# Altium PCB 1601-1.PcbDoc
Units mm, origin at the board's own origin, x right, y up, seen from the top; angles counter-clockwise.
Board outline 52.59 x 19.12 mm, 2 copper layers (Top Layer, Bottom Layer); 13 components, 0 nets, 26 pads, 0 vias.
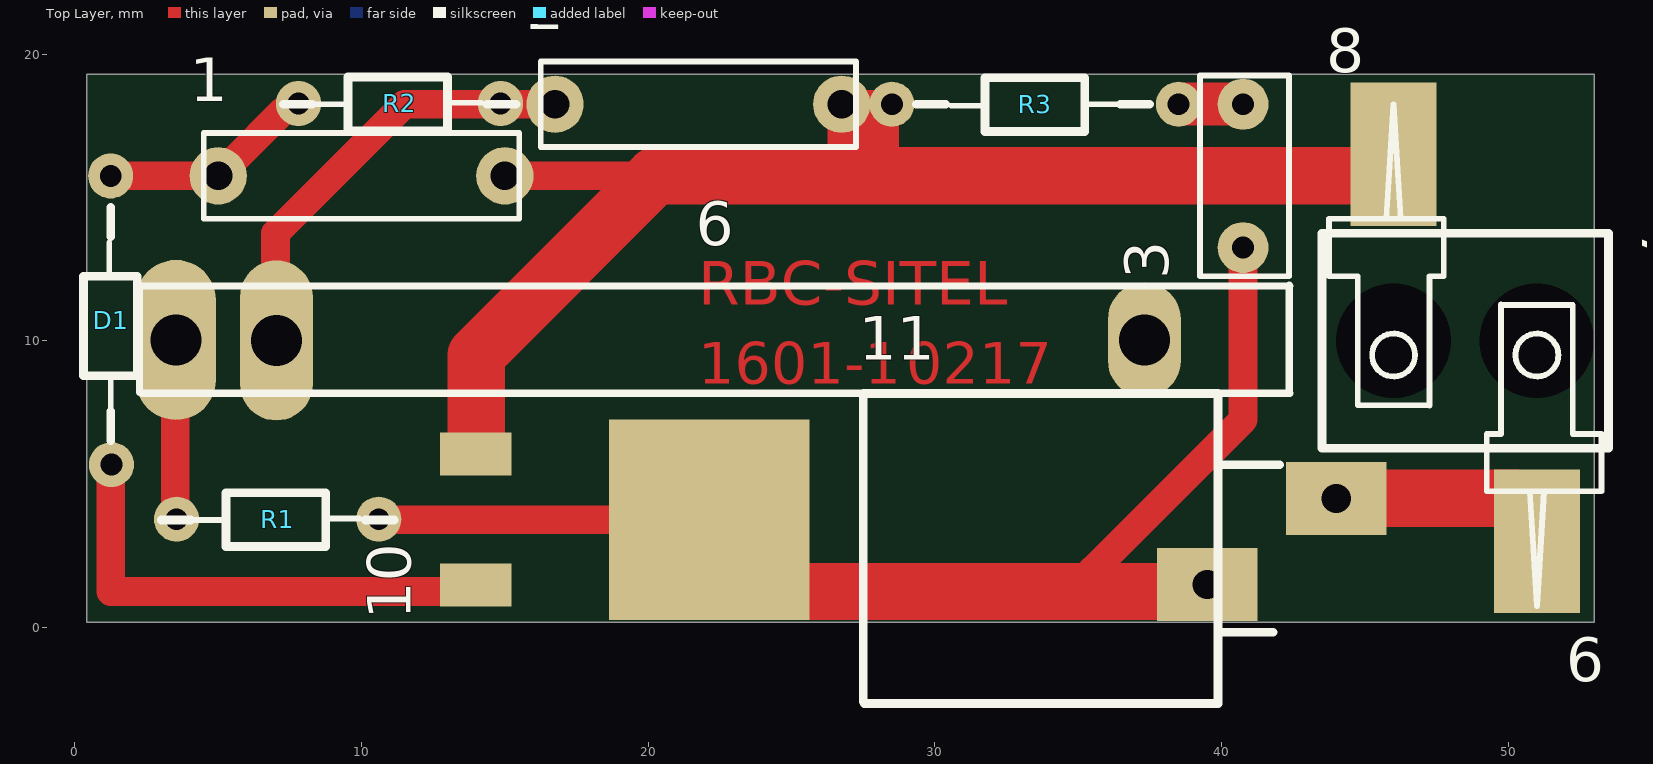
[diagram p0: Top Layer view]
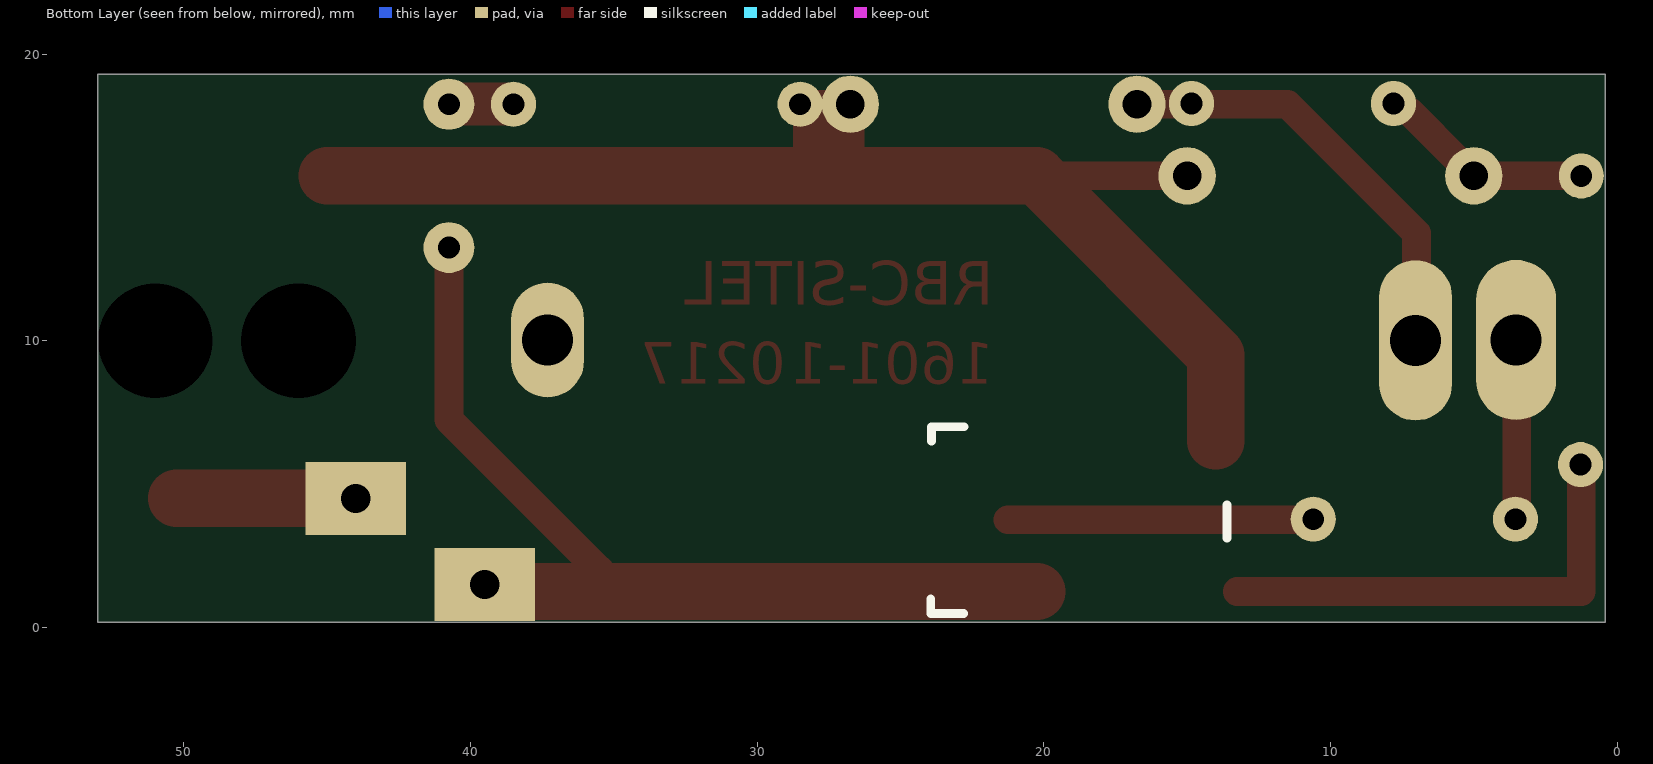
[diagram p1: Bottom Layer view, seen from below]

## Layer stack, top to bottom
Top Layer: signal copper 0.0356
Dielectric: dielectric 0.32, FR-4, Dk 4.8
Bottom Layer: signal copper 0.0356

## Board outline
0.412,0.179 53,0.179 53,19.301 0.412,19.301

## Design rules (kind name [scope] priority, off if disabled: settings)
Clearance [All] p1: gap=0.254
PlaneClearance [All] p1: clearance=0.254
PolygonConnect [All] p1: connectstyle=Relief reliefconductorwidth=0.254 reliefentries=4 polygonreliefangle="90 Angle"
RoutingVias [All] p1: holewidth=0.711 width=1.27 viastyle="Through Hole" minholewidth=0.711 minwidth=1.27 maxholewidth=0.711 maxwidth=1.27
SilkscreenOverComponentPads [All] p1: minsilkscreentomaskgap=0.254
SolderMaskExpansion [All] p1: expansion=0.051
Width [All] p1: maxlimit=0.254 minlimit=0.254 preferedwidth=0.254
26 further rules are at their usual default settings.

## Components (designator, comment, footprint, x,y, rotation, side; value= is the part's Value field where it differs from the comment)
1 "" .022MF400V 5,15.75 r0 top
2 "" .022MF400V 16.75,18.25 r0 top
3 "" .01MFX400VEP 40.75,13.25 r90 top
6 "" "POTE DESLIZA" 3.5,10 r0 top
7 "" BORNERA 46,10 r270 top
8 "" PIN 44.75,7.75 r0 top
9 "" PIN 52.25,11.25 r180 top
10 "" BT137SMD 25,-6 r90 top
11 "" "BOBINA VW" 33.5,2.75 r0 top
D1 "DIAC" R-UFILM#1 1.25,5.5 r90 top
R1 "15k" R-UFILM#2 2,3.75 r0 top
R2 "39k" R-UFILM#2 6.25,18.25 r0 top
R3 "82" R-UFILM#3 38.5,18.25 r180 top

## Footprints (in the part's own frame and the unit in brackets; to place one, negate y for a bottom-side part, rotate by r counter-clockwise, add the part's x,y. Pads: shape width x height; smd on the part's side, far side on the other; paste and mask are expansions set on the pad)
.01MFX400VEP [mil]
  round 70 hole 30: 1(0,0) 2(196.85,0)
  silkscreen extent -39,-63 236,59
.022MF400V [mm]
  round 2 hole 1: 1(0,0) 2(10,0)
  silkscreen extent -0.5,-1.49 10.5,1.49
"BOBINA VW" [mm]
  rect 3.5x2.54 hole 1.016: 1(10.5,1.75) 2(6,-1.25)
  silkscreen extent -5.99,-5.41 8.53,5.41
BORNERA [mm]
  round 3 hole 4: 1(0,0) 2(0,5)
  silkscreen extent -3.75,-2.5 3.75,7.5
BT137SMD [mm]
  rect 1.5x2.5 smd: 1(12.044,11.015) 3(7.474,11.015)
  rect 7x7 smd: 2(9.759,2.865)
PIN [mm]
  silkscreen extent -1,-0.01 3,10.5
"POTE DESLIZA" [mil]
  oval 110x220 hole 70: ""(1,1)
  oval 100x220 hole 70: ""(138.95,0.41)
  oval 100x157.48 hole 70: ""(1331,1)
  silkscreen extent -49,-72 1531,76
R-UFILM#1 [mil]
  round 62 hole 30: 1(7,-1) 2(403.54,0)
  silkscreen extent 40,-36 360,37
R-UFILM#2 [mil]
  round 62 hole 30: 1(61.02,0.98) 2(338.58,0.98)
  silkscreen extent 40,-36 360,37
R-UFILM#3 [mil]
  round 62 hole 30: 1(0,0) 2(393.7,0)
  silkscreen extent 40,-36 360,37

## Free pads (board coordinates)
  rect 3x5 smd: 1(46,16.5) 2(51,3)

## Nets (pads, with @x,y where several pads share a name; then routed paths per layer and width w, separated by ;. In a path a pad name is that pad's centre, name@x,y a point inside that pad or via, vN(x,y) a via of type N, cw(c..) or ccw(c..) an arc to the next point about the centre after c; other vN are vias at no path point)
pads on no net: 1.1 1.2 2.1 2.2 3.1 3.2 6. 7.1 7.2 10.1 10.2 10.3 11.1 11.2 D1.1 D1.2 R1.1 R1.2 R2.1 R2.2 R3.1 R3.2
copper on no net: | length 136.4
  Top Layer w1: 1.25,5.75 1.25,1.25 13.25,1.25 ; 1.25,15.75 5,15.75 ; 3.5,4 3.5,10.75 ; 5.5,16.25 7.25,18 ; 7,12.5 7,13.75 11.5,18.25 15,18.25 ; 10.75,3.75 21.25,3.75 ; 14.75,18.25 16.75,18.25 ; 15.25,15.75 21.5,15.75 ; 35.5,2 40.75,7.25 40.75,13.25
  Top Layer w1.5: 38.75,18.25 40.75,18.25
  Top Layer w2: 14,6.5 14,9.5 20.25,15.75 45,15.75 ; 20.25,1.25 39.25,1.25 ; 44.25,4.5 50.25,4.5

## Other copper
Top Layer:
  rectangle: 26.25,15.75 28.75,18.75
  text "panel de 2 placas (110mm) x 8 placas (160mm)" at 4.445,30.353 h1.52
  text "Realizar los cortes" at 59.306,22.75 h1
  text "justo sobre los tracks" at 59.256,21.125 h1
  text "que limitan la placa" at 59.181,19.375 h1
  text "1)Material= FR4 1mm" at 59.306,15.375 h1
  text "2) mascara antisoldante" at 59.181,12.825 h1
  text "RBC-SITEL" at 21.75,11.25 h1.52
  text "1601-1" at 21.75,8.5 h1.45
  text "0217" at 29,8.5 h1.45

## Silkscreen, mask and mechanical layers (free items; w line width, h text height)
Mechanical 1:
  lines w0.1: 0,23.5 0,24 ; 1.375,23.292 0,23.75 ; 1.375,24.208 0,23.75 ; 24.959,23.75 0,23.75 ; 30.041,23.75 55,23.75 ; 53.625,23.292 55,23.75 ; 53.625,24.208 55,23.75 ; 55,23.5 55,24 ; 56.792,1.375 57.25,0 ; 56.792,19.625 57.25,21 ; 57,0 57.5,0 ; 57,21 57.5,21 ; 57.25,8.059 57.25,0 ; 57.25,12.941 57.25,21 ; 57.708,1.375 57.25,0 ; 57.708,19.625 57.25,21
  lines w0.254: 0,2.794 0,0 3.048,0 ; 0,18 0,20 2.54,20 ; 53,0 55,0 55,3 ; 53,20 55,20 55,18
  text "55mm" at 25.213,23.063 h1.2
  text "20mm" at 57.937,8.313 h1.2 r90